# Allegro board LAYOUT.brd
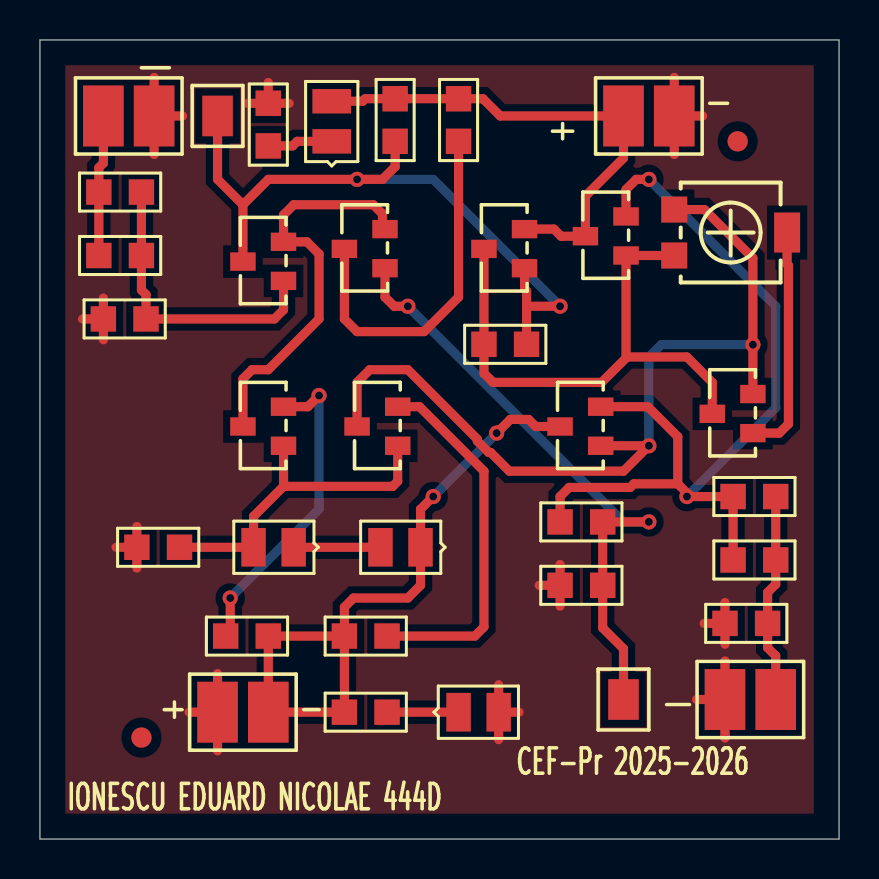
[diagram p0: board, top side]
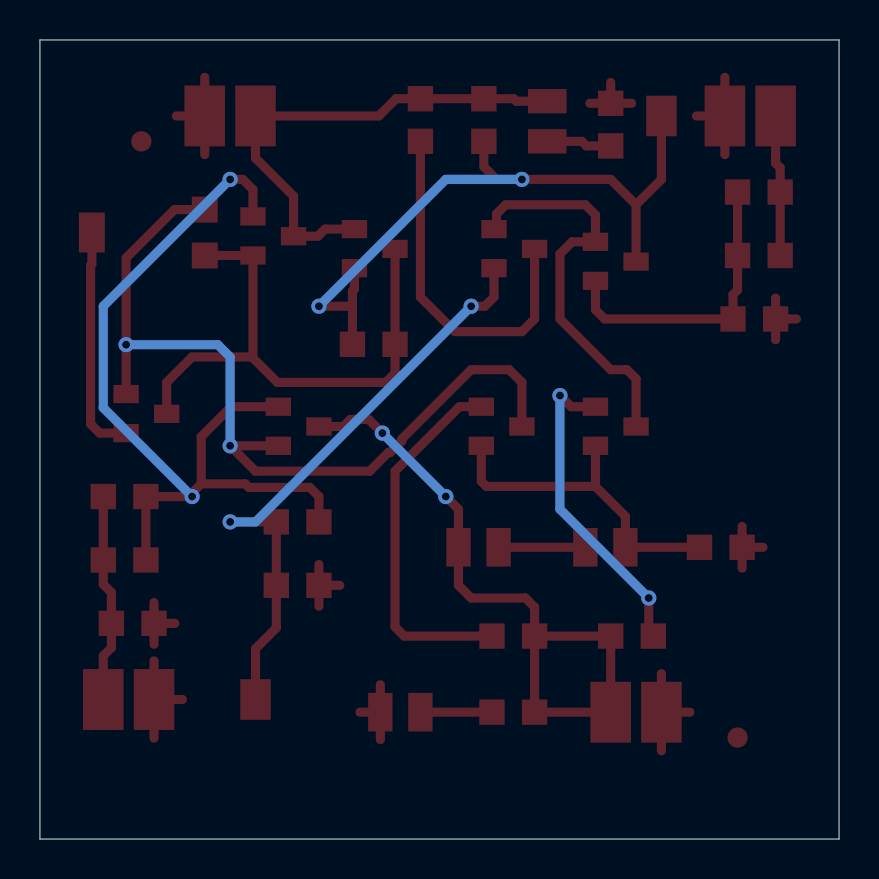
[diagram p1: board, bottom side, seen from below]

Outline 40 x 40 mm; copper layers: TOP, BOTTOM. Coordinates in mm from the lower left corner of the outline.
Outline path: 0,40 40,40 40,0 0,0 0,40

## Design rules (mm)
constraint set DEFAULT: min track width 0.457

## Placement (name value [footprint] x y rotation side)
C4  4.7u  [SMC0805]  5.08 32.38 180 top
C5  4.7u  [SMC0805]  36.83 13.97 180 top
C6  220p  [SMC0805]  22.23 24.77 0 top
C7  4.7u  [SMC0805]  36.83 17.14 180 top
C8  4.7u  [SMC0805]  5.08 29.21 180 top
D1  led  [SMD0805]  14.61 34.92 90 top
D2  D1N4148  [SMD0805]  12.7 14.61 180 top
D3  D1N4148  [SMD0805]  19.05 14.61 180 top
D4  led  [SMD0805]  20.95 6.35 0 top
NOREF  -  []  0 40 0 top
NOREF#2  -  []  0 0 0 top
NOREF#3  -  [unnamed#2]  5.08 5.08 0 top
NOREF#4  -  [unnamed#2]  34.92 34.92 0 top
NOREF#5  -  []  40 0 90 top
NOREF#6  -  []  0 0 90 top
P2  2k  [TS53YL]  31.75 29.21 180 top
Q1  QBC846B  [TO236]  12.06 27.94 0 top
Q2  QBC846B  [TO236]  17.14 28.57 0 top
Q5  QBC846B  [TO236]  12.06 19.68 0 top
Q6  QBC856B  [TO236]  24.13 28.57 0 top
Q7  QBC846B  [TO236]  17.78 19.68 0 top
Q8  QBC817-25  [TO236]  29.21 29.21 0 top
Q9  QBC807-25  [TO236]  27.94 19.68 0 top
Q10  QBC846B  [TO236]  35.56 20.32 0 top
R3  680  [SMR0805]  11.43 10.16 180 top
R16  1k  [SMR0805]  26.04 12.7 0 top
R17  9.1k  [SMR0805]  26.04 15.88 0 top
R19  220k  [SMR0805]  3.17 26.04 0 top
R20  1k  [SMR0805]  17.78 34.92 90 top
R21  68  [SMR0805]  15.24 10.16 0 top
R22  10k  [SMR0805]  6.99 14.61 180 top
R23  1k  [SMR0805]  20.95 34.92 90 top
R24  1.8k  [SMR0805]  11.43 36.83 270 top
R25  1.8k  [SMR0805]  15.24 6.35 0 top
RL  150  [SMR0805]  34.29 10.79 0 top
VCC  CON2  [JUMPER2]  29.21 36.2 0 top
VEE  CON2  [JUMPER2]  8.89 6.35 0 top
VF  CON1  [JUMPER1]  29.21 6.99 0 top
VIN  CON2  [JUMPER2]  3.17 36.2 0 top
VO  CON2  [JUMPER2]  36.83 6.99 180 top
VO1  CON1  [JUMPER1]  8.89 36.2 0 top

## Library data of the parts
C4-C8 = C
D1 D4 = MLED81_0
D2 D3 = D1N4148_0
P2 = POT
Q1 Q2 Q5 Q7 Q10 = QBC846B_0
Q6 = QBC856B_0
Q8 = QBC817-25_0
Q9 = QBC807-25_0
R3 R16 R17 R19-R25 RL = r
VCC VEE VIN VO = CON2: User Part Number: ***
VF VO1 = CON1: User Part Number: ***

## Footprints (pads in the part's own frame, mm; a bottom-side part is the same pattern mirrored in y, then rotated)
JUMPER1
  rect 1.524x2.032 smd: 1(0,0)
JUMPER2
  rect 2.032x3.048 smd: 1(0,0) 2(2.54,0)
SMC0805
  rect 1.27x1.27 smd: 1(0,0) 2(2.134,0)
SMD0805
  rect 1.219x1.93 smd: A(2.007,0) C(0,0)
SMR0805
  rect 1.27x1.27 smd: 1(0,0) 2(2.134,0)
TO236
  rect 1.27x0.914 smd: 1(0.127,0) 2(0.127,1.956) 3(-1.905,0.965)
TS53YL
  rect 1.3x1.3 smd: 1(0,0) 3(0,-2.3)
  rect 1.3x2 smd: 2(-5.65,-1.15)
unnamed#2
  round 1.016 smd: (0,0)

## Nets
VCC: D1.A Q6.2 Q8.3 R20.2 R23.2 VCC.1
VEE: D3.C(2) Q9.3 R3.1 R21.1 R25.1 VEE.2
VIN: C4.2 C8.2 VIN.1
0: D4.A R16.1 R19.1 R22.2 R24.1 RL.1 VCC.2 VEE.1 VIN.2 VO.2
VF: Q2.1 R16.2 R17.2 VF.1
VO: C5.1 C7.1 RL.2 VO.1
VOUT: C5.2 C7.2 Q8.2 Q9.2 R17.1
N180404: Q1.2 Q2.2 Q5.3
N180440: C6.1 P2.1 Q6.3 Q8.1 Q10.3
N180444: P2.3 Q7.3 Q9.1 Q10.2
N180516: Q7.2 R21.2
N180522: D2.A Q5.1 Q7.1 R22.1
N180696: C4.1 C8.1 Q1.1 R19.2
N180916: C6.2 Q1.3 Q6.1 R20.1 VO1.1
N181108: Q2.3 R23.1
N1802841: D1.C(2) R24.2
N1803521: D4.C(2) R25.2
N1804622: P2.2(T) Q10.1
N1805341: D2.C(2) D3.A
N1808260: Q5.2 R3.2

## Via types
v1: diameter 0.762, hole 0.4, TOP to BOTTOM, 12 vias

## Routing (per net, layer and track width the routed paths; a pad name or vN(x,y) marks a point on that pad's centre or on a via; arc(x,y) is an arc through that point)
VCC: length 25
  TOP w0.457: D1.A 16.15,36.93 16.28,37.06 R20.2 R23.2 22.17,37.06 23.04,36.2 VCC.1 29.21,34.09 27.3,32.18 Q8.3 26.09,30.18 25.73,30.53 Q6.2
VEE: length 33.8
  TOP w0.457: v1(22.86,20.32) 23.54,21 24.46,21 24.82,20.65 Q9.3 ; R21.1 15.24,11.61 15.7,12.06 18.41,12.06 19.05,12.7 D3.C 19.05,16.51 v1(19.68,17.14) ; R21.1 R25.1 VEE.2 R3.1 R21.1
  BOTTOM w0.457: v1(19.68,17.14) v1(22.86,20.32)
VIN: length 7.1
  TOP w0.457: VIN.1 3.17,33.83 2.95,33.6 C4.2 C8.2
0: length 40.5
  TOP w0.457: RL.1 34.29,11.84 ; RL.1 34.29,9.75 ; RL.1 33.25,10.79 ; 3.17,24.99 R19.1 ; R19.1 3.17,27.08 ; R19.1 2.13,26.04 ; 24.99,12.7 R16.1 ; R16.1 26.04,13.74 ; R16.1 26.04,11.66 ; D4.A 23.98,6.35 ; D4.A 22.96,7.72 ; D4.A 22.96,4.98 ; 34.29,5.05 VO.2 ; VO.2 32.87,6.99 ; VO.2 34.29,8.92 ; VIN.2 7.14,36.2 ; VIN.2 5.71,34.26 ; VIN.2 5.71,38.13 ; 10.39,36.83 R24.1 ; R24.1 12.47,36.83 ; R24.1 11.43,37.87 ; 8.89,4.42 VEE.1 ; VEE.1 7.47,6.35 ; VEE.1 8.89,8.28 ; R22.2 4.85,15.65 ; R22.2 4.85,13.56 ; R22.2 3.81,14.61 ; VCC.2 31.75,38.13 ; VCC.2 31.75,34.26 ; VCC.2 33.17,36.2
VF: length 30.9
  TOP w0.457: v1(18.41,26.67) 17.73,26.67 17.27,27.13 Q2.1 ; VF.1 29.21,9.53 28.17,10.57 R16.2 R17.2 v1(30.48,15.88)
  BOTTOM w0.457: v1(18.41,26.67) 29.21,15.88 v1(30.48,15.88)
VO: length 10.5
  TOP w0.457: C7.1 C5.1 36.83,12.75 36.42,12.34 RL.2 36.42,9.58 36.83,9.17 VO.1
VOUT: length 43.7
  TOP w0.457: Q8.2 29.34,32.51 29.84,33.02 v1(30.48,33.02) ; C5.2 C7.2 32.56,17.14 ; 31.93,17.78 29.72,17.78 29.55,17.6 26.49,17.6 26.04,17.14 R17.1 ; 31.93,17.78 32.56,17.14 ; 31.93,17.78 31.93,20.14 30.43,21.64 Q9.2 ; v1(32.38,17.14) 32.56,17.14
  BOTTOM w0.457: v1(30.48,33.02) 36.83,26.67 36.83,21.59 v1(32.38,17.14)
N180404: length 20.2
  TOP w0.457: Q2.2 17.14,30.66 17.14,31.29 16.69,31.75 12.7,31.75 12.19,31.24 Q1.2 13.36,29.9 13.97,29.29 13.97,26.04 11.43,23.5 10.62,23.5 10.16,23.04 Q5.3
N180440: length 28
  TOP w0.457: Q10.3 33.66,22.86 32.38,24.13 29.39,24.13 29.34,24.08 ; 29.34,24.08 Q8.1 P2.1 ; 29.34,24.08 28.12,22.86 22.68,22.86 22.23,23.32 C6.1 Q6.3
N180444: length 43.8
  TOP w0.457: Q7.3 15.88,22.86 16.51,23.5 18.41,23.5 21.89,20.02 21.89,19.92 22.46,19.35 22.56,19.35 23.5,18.41 29.21,18.41 v1(30.48,19.68) Q9.1 ; P2.3 33.26,31.51 35.69,29.08 v1(35.69,24.75) Q10.2
  BOTTOM w0.457: v1(35.69,24.75) 31.1,24.75 30.48,24.13 v1(30.48,19.68)
N180516: length 18.5
  TOP w0.457: Q7.2 19,21.64 22.23,18.41 22.23,10.62 21.77,10.16 R21.2
N180522: length 17
  TOP w0.457: Q7.1 17.91,17.91 17.65,17.65 12.19,17.65 ; Q5.1 12.19,17.65 ; 12.19,17.65 10.69,16.15 D2.A R22.1
N180696: length 15
  TOP w0.457: C4.1 C8.1 5.08,27.48 5.31,27.25 R19.2 11.73,26.04 12.19,26.49 Q1.1
N180916: length 35.8
  TOP w0.457: Q6.1 24.26,27.53 24.36,27.43 24.36,26.67 ; 10.16,31.75 8.89,33.02 VO1.1 ; 10.16,31.75 11.43,33.02 v1(15.88,33.02) 17.14,33.02 17.78,33.66 R20.1 ; 10.16,31.75 Q1.3 ; C6.2 24.36,26.67 ; 24.36,26.67 v1(26.04,26.67)
  BOTTOM w0.457: v1(15.88,33.02) 19.68,33.02 v1(26.04,26.67)
N181108: length 18
  TOP w0.457: Q2.3 15.24,26.04 15.88,25.4 19.23,25.4 20.95,27.13 R23.1
N1802841: length 3.3
  TOP w0.457: R24.2 12.65,34.7 12.88,34.92 D1.C
N1803521: length 3.6
  TOP w0.457: R25.2 D4.C
N1804622: length 11.6
  TOP w0.457: P2.2 37.4,28.78 37.47,28.71 37.47,20.78 37.01,20.32 Q10.1
N1805341: length 4.3
  TOP w0.457: D2.C D3.A
N1808260: length 16
  TOP w0.457: v1(9.53,12.06) 9.53,10.39 R3.2 ; v1(13.97,22.2) 13.41,21.64 Q5.2
  BOTTOM w0.457: v1(13.97,22.2) 13.97,16.51 v1(9.53,12.06)

## Copper pours and planes (outline as drawn; the poured copper is in the pictures)
0 on TOP: 38.73,1.27 38.73,38.73 1.27,38.73 1.27,1.27 ; 13 cut-outs

## Text on the board
Ref Des/Silkscreen Top: IONESCU EDUARD NICOLAE 444D | CEF-Pr 2025-2026
NCLEGEND-1-2: FIGURE | SIZE | 15.74 | DRILL CHART: TOP to BOTTOM | ALL UNITS ARE IN MILS | PLATED | QTY | 12
XSECTION_CHART: *  SURFACE - AIR 0 MIL | L1: TOP CONDUCTOR - COPPER 0.71 MIL | *  DIELECTRIC - FR-4 61.57 MIL | L2: BOTTOM CONDUCTOR - COPPER 0.71 MIL | DESIGN CROSS SECTION CHART | ___________________________ | TOTAL THICKNESS 62.99 MIL | 1-2
